# EAGLE board Lipo-Charger-5V-setup_RevC_onelayer (EAGLE 8.2.1)
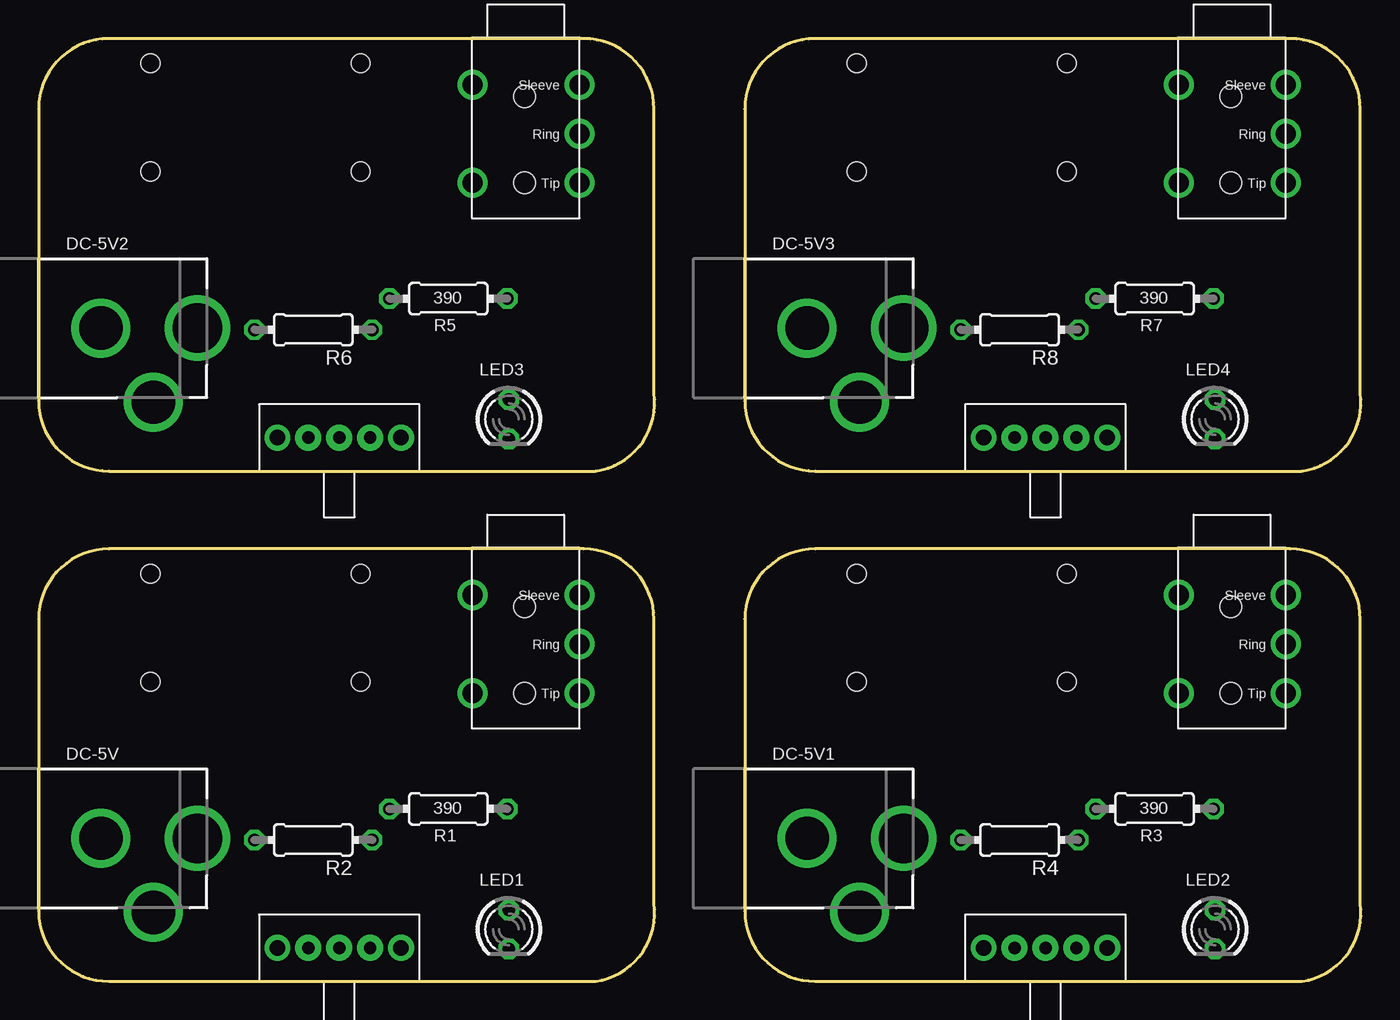
[diagram p0: board, top side]
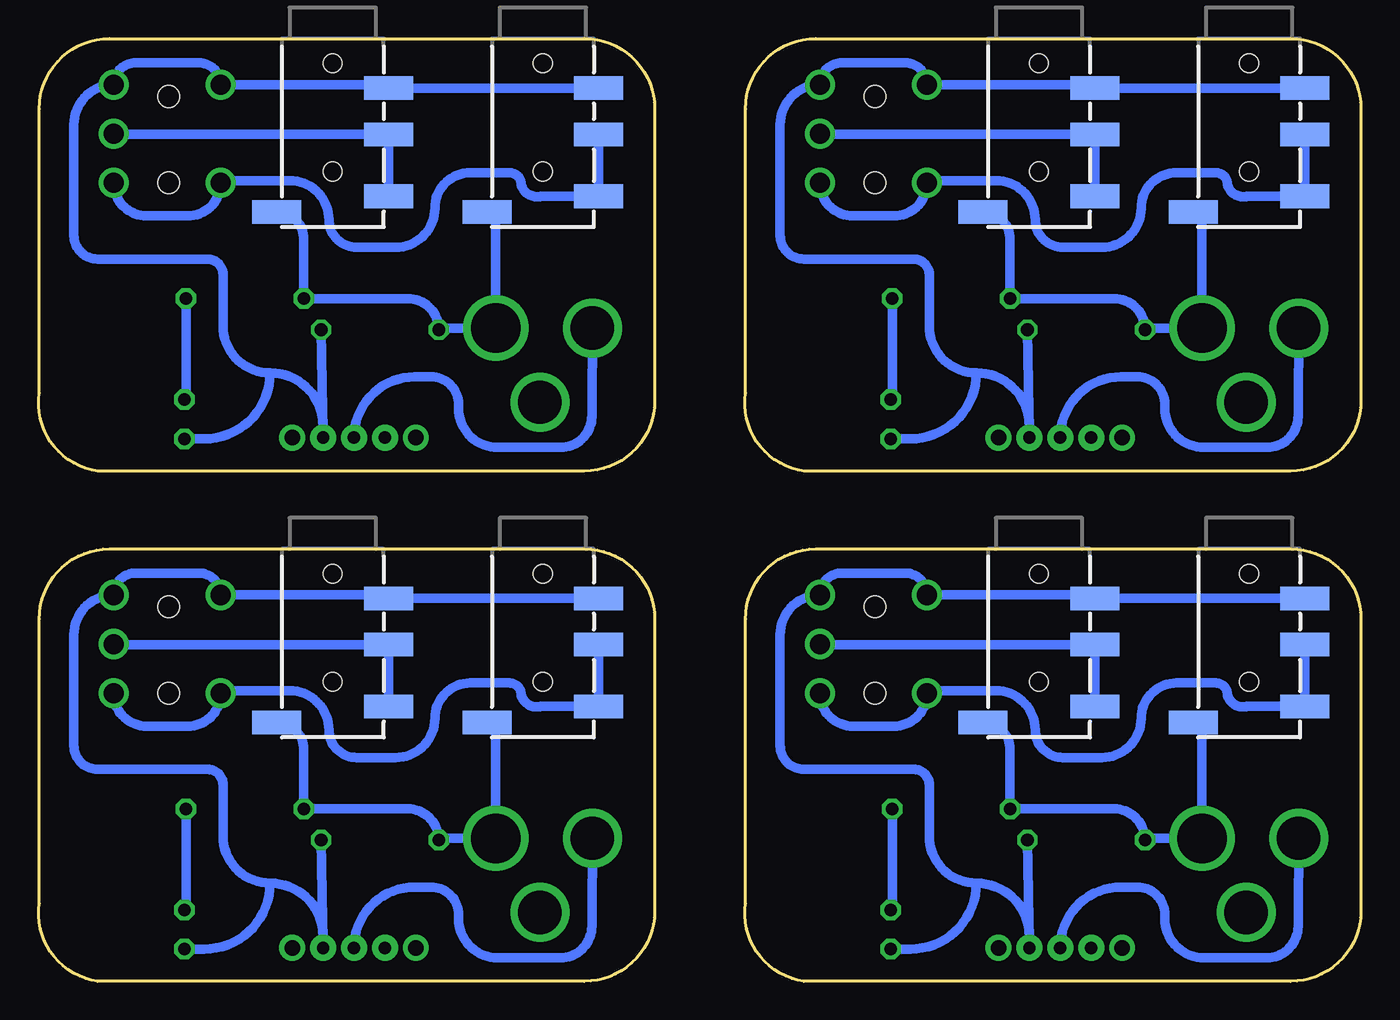
[diagram p1: board, bottom side, seen from below]

Size 85.6 x 61 mm. Coordinates in mm from the lower left corner, seen from the top.
Outline: 0,4.54 arc90 4.54,0 36.06,0 arc90 39.84,5.05 39.84,23.44 arc90 35.3,27.98 4.54,27.98 arc90 0,23.44 0,4.54
Outline: 45.72,4.54 arc90 50.26,0 81.78,0 arc90 85.56,5.05 85.56,23.44 arc90 81.02,27.98 50.26,27.98 arc90 45.72,23.44 45.72,4.54
Outline: 0,37.56 arc90 4.54,33.02 36.06,33.02 arc90 39.84,38.07 39.84,56.46 arc90 35.3,61 4.54,61 arc90 0,56.46 0,37.56
Outline: 45.72,37.56 arc90 50.26,33.02 81.78,33.02 arc90 85.56,38.07 85.56,56.46 arc90 81.02,61 50.26,61 arc90 45.72,56.46 45.72,37.56
Copper layers (1*16): Top 0.035mm / dielectric 1.5mm / Bottom 0.035mm
Design rules "default *": minimum track width 10mil, minimum drill 24mil, track to track 10mil, track to pad 10mil, pad to pad 10mil, via to via 10mil, smd to smd 8mil, copper to edge 40mil, drill to drill 8mil, minimum pad ring 10mil, minimum via ring 8mil, stop-mask expansion 4mil, vias tented up to drill 0mil, thermal gap 10mil

## Footprints (pad centres in the part's own frame; a part is rotated, then mirrored left to right if it is on the bottom)
1/8"-F-STEREO-PCB = drill 1.3: RING 5.461,0; SLEEVE1 8.636,6.934; SLEEVE2 8.636,0; TIP1 2.286,6.934; TIP2 2.286,0 | hole 1.4: 2.286,3.556; 7.874,3.556
DCJACK_2MM_PTH = drill 2.8: GND 0,7.35; GNDBREAK 4.8,10.75 | drill 3.2: PWR 0,13.6
LED3MM = drill 0.813 octagon: A -1.27,0; K 1.27,0
SWITCH_SPDT-TE-CONNECT = drill 0.8 pad 1.676: 1 2,0; 2 4,0; 3 6,0 | drill 1 pad 1.676: MOUNT1 0,0; MOUNT2 8,0
0204/7 = drill 0.813 octagon: 1 -3.81,0; 2 3.81,0
AUDIO-JACK-TRRS-SMD = smd 1.524 x 3.175: EARTH 11.227,-3.619; RING1 6.2,3.619; RING2 3.2,3.619; TIP 10.2,3.619 | hole 1.2: 1.6,0; 8.6,0

## Placement (x,y rotation side)
AUDIO_OUT  1/8"-F-STEREO-PCB  [1/8"-F-STEREO-PCB]  35.02,16.36 90 top
AUDIO_OUT1  1/8"-F-STEREO-PCB  [1/8"-F-STEREO-PCB]  80.74,16.36 90 top
AUDIO_OUT2  1/8"-F-STEREO-PCB  [1/8"-F-STEREO-PCB]  35.02,49.38 90 top
AUDIO_OUT3  1/8"-F-STEREO-PCB  [1/8"-F-STEREO-PCB]  80.74,49.38 90 top
DC-5V  [DCJACK_2MM_PTH]  -3.32,9.25 270 top
DC-5V1  [DCJACK_2MM_PTH]  42.4,9.25 270 top
DC-5V2  [DCJACK_2MM_PTH]  -3.32,42.27 270 top
DC-5V3  [DCJACK_2MM_PTH]  42.4,42.27 270 top
LED1  [LED3MM]  30.44,3.35 270 top
LED2  [LED3MM]  76.16,3.35 270 top
LED3  [LED3MM]  30.44,36.38 270 top
LED4  [LED3MM]  76.16,36.38 270 top
POWER  SPDT  [SWITCH_SPDT-TE-CONNECT]  15.46,2.16 0 top
POWER1  SPDT  [SWITCH_SPDT-TE-CONNECT]  61.18,2.16 0 top
POWER2  SPDT  [SWITCH_SPDT-TE-CONNECT]  15.46,35.18 0 top
POWER3  SPDT  [SWITCH_SPDT-TE-CONNECT]  61.18,35.18 0 top
R1  390  [0204/7]  26.52,11.16 180 top
R2  50  [0204/7]  17.78,9.14 180 top
R3  390  [0204/7]  72.24,11.16 180 top
R4  50  [0204/7]  63.5,9.14 180 top
R5  390  [0204/7]  26.52,44.18 180 top
R6  50  [0204/7]  17.78,42.16 180 top
R7  390  [0204/7]  72.24,44.18 180 top
R8  50  [0204/7]  63.5,42.16 180 top
U$1  AUDIO-JACK3LGPADS  [AUDIO-JACK-TRRS-SMD]  52.96,27.98 270 bottom
U$2  AUDIO-JACK3LGPADS  [AUDIO-JACK-TRRS-SMD]  66.56,27.98 270 bottom
U$3  AUDIO-JACK3LGPADS  [AUDIO-JACK-TRRS-SMD]  7.24,61 270 bottom
U$4  AUDIO-JACK3LGPADS  [AUDIO-JACK-TRRS-SMD]  7.24,27.98 270 bottom
U$5  AUDIO-JACK3LGPADS  [AUDIO-JACK-TRRS-SMD]  20.84,27.98 270 bottom
U$6  AUDIO-JACK3LGPADS  [AUDIO-JACK-TRRS-SMD]  20.84,61 270 bottom
U$7  AUDIO-JACK3LGPADS  [AUDIO-JACK-TRRS-SMD]  52.96,61 270 bottom
U$8  AUDIO-JACK3LGPADS  [AUDIO-JACK-TRRS-SMD]  66.56,61 270 bottom

## Library data of the parts
AUDIO_OUT AUDIO_OUT1-AUDIO_OUT3 POWER POWER1-POWER3 R1-R8 = CMU-ArtFab
DC-5V DC-5V1-DC-5V3 = microbuilder
LED1-LED4 = led
U$1-U$8 = CMU-ArtFab; 5V: +5V; AUDIO: AUDIO; AUDIO_: AUDIO; GND: GND

## Nets
+5V: DC-5V.PWR R1.2 R2.2 U$4.EARTH U$5.EARTH
+5V1: DC-5V1.PWR R3.2 R4.2 U$1.EARTH U$2.EARTH
+5V2: DC-5V2.PWR R5.2 R6.2 U$3.EARTH U$6.EARTH
+5V3: DC-5V3.PWR R7.2 R8.2 U$7.EARTH U$8.EARTH
GND: AUDIO_OUT.SLEEVE1 AUDIO_OUT.SLEEVE2 LED1.K POWER.3 R2.1 U$4.RING2 U$5.RING2
GND1: AUDIO_OUT1.SLEEVE1 AUDIO_OUT1.SLEEVE2 LED2.K POWER1.3 R4.1 U$1.RING2 U$2.RING2
GND2: AUDIO_OUT2.SLEEVE1 AUDIO_OUT2.SLEEVE2 LED3.K POWER2.3 R6.1 U$3.RING2 U$6.RING2
GND3: AUDIO_OUT3.SLEEVE1 AUDIO_OUT3.SLEEVE2 LED4.K POWER3.3 R8.1 U$7.RING2 U$8.RING2
GNDBREAK: DC-5V.GNDBREAK
GNDBREAK1: DC-5V1.GNDBREAK
GNDBREAK2: DC-5V2.GNDBREAK
GNDBREAK3: DC-5V3.GNDBREAK
N$1: LED2.A R3.1
N$2: LED1.A R1.1
N$3: AUDIO_OUT1.RING U$2.RING1 U$2.TIP
N$4: DC-5V.GND POWER.2
N$5: DC-5V1.GND POWER1.2
N$6: LED3.A R5.1
N$7: AUDIO_OUT2.RING U$6.RING1 U$6.TIP
N$8: AUDIO_OUT.RING U$5.RING1 U$5.TIP
N$9: DC-5V2.GND POWER2.2
N$10: LED4.A R7.1
N$11: AUDIO_OUT3.RING U$8.RING1 U$8.TIP
N$12: DC-5V3.GND POWER3.2
OUT1: AUDIO_OUT1.TIP1 AUDIO_OUT1.TIP2 U$1.RING1 U$1.TIP
OUT2: AUDIO_OUT.TIP1 AUDIO_OUT.TIP2 U$4.RING1 U$4.TIP
OUT3: AUDIO_OUT2.TIP1 AUDIO_OUT2.TIP2 U$3.RING1 U$3.TIP
OUT4: AUDIO_OUT3.TIP1 AUDIO_OUT3.TIP2 U$7.RING1 U$7.TIP

## Tracks (layer width: path | path; a pad name or v marks a point on that pad's centre or on a via)
+5V
  Bottom 0.61: U$5.EARTH arc90 22.71,15.01 R1.2 15.98,11.16 arc90 R2.2 arc90 13.86,9.25 DC-5V.PWR 10.28,16.18 arc-90 U$4.EARTH
+5V1
  Bottom 0.61: U$2.EARTH arc90 68.43,15.01 R3.2 61.7,11.16 arc90 R4.2 arc90 59.58,9.25 DC-5V1.PWR 56,16.18 arc-90 U$1.EARTH
+5V2
  Bottom 0.61: U$6.EARTH arc90 22.71,48.03 R5.2 15.98,44.18 arc90 R6.2 arc90 13.86,42.27 DC-5V2.PWR 10.28,49.2 arc-90 U$3.EARTH
+5V3
  Bottom 0.61: U$8.EARTH arc90 68.43,48.03 R7.2 61.7,44.18 arc90 R8.2 arc90 59.58,42.27 DC-5V3.PWR 56,49.2 arc-90 U$7.EARTH
GND
  Bottom 0.61: 24.89,6.35 arc90 27.94,9.4 27.94,12.7 arc-90 28.96,13.72 36.07,13.72 arc90 37.59,15.24 37.59,22.42 arc90 AUDIO_OUT.SLEEVE2 arc90 33.6,26.42 29.5,26.42 arc90 AUDIO_OUT.SLEEVE1 17.44,25 arc90 U$5.RING2 U$4.RING2 | 24.89,6.35 arc90 21.46,2.92 POWER.3 R2.1 | LED1.K 29.16,2.08 arc-90 24.89,6.35
GND1
  Bottom 0.61: 70.61,6.35 arc90 73.66,9.4 73.66,12.7 arc-90 74.68,13.72 81.79,13.72 arc90 83.31,15.24 83.31,22.42 arc90 AUDIO_OUT1.SLEEVE2 arc90 79.32,26.42 75.22,26.42 arc90 AUDIO_OUT1.SLEEVE1 63.16,25 arc90 U$2.RING2 U$1.RING2 | 70.61,6.35 arc90 67.18,2.92 POWER1.3 R4.1 | LED2.K 74.88,2.08 arc-90 70.61,6.35
GND2
  Bottom 0.61: 24.89,39.37 arc90 27.94,42.42 27.94,45.72 arc-90 28.96,46.74 36.07,46.74 arc90 37.59,48.26 37.59,55.44 arc90 AUDIO_OUT2.SLEEVE2 arc90 33.6,59.44 29.5,59.44 arc90 AUDIO_OUT2.SLEEVE1 17.44,58.02 arc90 U$6.RING2 U$3.RING2 | 24.89,39.37 arc90 21.46,35.94 POWER2.3 R6.1 | LED3.K 29.16,35.11 arc-90 24.89,39.37
GND3
  Bottom 0.61: 70.61,39.37 arc90 73.66,42.42 73.66,45.72 arc-90 74.68,46.74 81.79,46.74 arc90 83.31,48.26 83.31,55.44 arc90 AUDIO_OUT3.SLEEVE2 arc90 79.32,59.44 75.22,59.44 arc90 AUDIO_OUT3.SLEEVE1 63.16,58.02 arc90 U$8.RING2 U$7.RING2 | 70.61,39.37 arc90 67.18,35.94 POWER3.3 R8.1 | LED4.K 74.88,35.11 arc-90 70.61,39.37
N$1
  Bottom 0.61: R3.1 76.05,4.73 arc90 LED2.A
N$2
  Bottom 0.61: R1.1 30.33,4.73 arc90 LED1.A
N$3
  Bottom 0.61: U$2.TIP U$2.RING1 80.7,21.78 arc90 AUDIO_OUT1.RING
N$4
  Bottom 0.61: DC-5V.GND 4.06,4.06 4.06,3.56 arc90 6.1,1.52 10.16,1.52 arc90 12.7,4.06 12.7,4.32 arc-90 14.48,6.1 15.52,6.1 arc-90 POWER.2
N$5
  Bottom 0.61: DC-5V1.GND 49.78,4.06 49.78,3.56 arc90 51.82,1.52 55.88,1.52 arc90 58.42,4.06 58.42,4.32 arc-90 60.2,6.1 61.24,6.1 arc-90 POWER1.2
N$6
  Bottom 0.61: R5.1 30.33,37.75 arc90 LED3.A
N$7
  Bottom 0.61: U$6.TIP U$6.RING1 34.98,54.8 arc90 AUDIO_OUT2.RING
N$8
  Bottom 0.61: U$5.TIP U$5.RING1 34.98,21.78 arc90 AUDIO_OUT.RING
N$9
  Bottom 0.61: DC-5V2.GND 4.06,37.08 4.06,36.58 arc90 6.1,34.54 10.16,34.54 arc90 12.7,37.08 12.7,37.34 arc-90 14.48,39.12 15.52,39.12 arc-90 POWER2.2
N$10
  Bottom 0.61: R7.1 76.05,37.75 arc90 LED4.A
N$11
  Bottom 0.61: U$8.TIP U$8.RING1 80.7,54.8 arc90 AUDIO_OUT3.RING
N$12
  Bottom 0.61: DC-5V3.GND 49.78,37.08 49.78,36.58 arc90 51.82,34.54 55.88,34.54 arc90 58.42,37.08 58.42,37.34 arc-90 60.2,39.12 61.24,39.12 arc-90 POWER3.2
OUT1
  Bottom 0.61: U$1.RING1 U$1.TIP 53.09,17.78 arc90 54.36,18.54 arc-90 55.12,19.3 57.66,19.3 arc-90 59.94,17.02 arc90 62.48,14.48 65.02,14.48 arc90 66.8,16.26 arc-90 69.34,18.8 73.66,18.8 arc-90 AUDIO_OUT1.TIP1 arc90 75.94,16.51 78.6,16.51 arc90 AUDIO_OUT1.TIP2
OUT2
  Bottom 0.61: U$4.RING1 U$4.TIP 7.37,17.78 arc90 8.64,18.54 arc-90 9.4,19.3 11.94,19.3 arc-90 14.22,17.02 arc90 16.76,14.48 19.3,14.48 arc90 21.08,16.26 arc-90 23.62,18.8 27.94,18.8 arc-90 AUDIO_OUT.TIP1 arc90 30.22,16.51 32.88,16.51 arc90 AUDIO_OUT.TIP2
OUT3
  Bottom 0.61: U$3.RING1 U$3.TIP 7.37,50.8 arc90 8.64,51.56 arc-90 9.4,52.32 11.94,52.32 arc-90 14.22,50.04 arc90 16.76,47.5 19.3,47.5 arc90 21.08,49.28 arc-90 23.62,51.82 27.94,51.82 arc-90 AUDIO_OUT2.TIP1 arc90 30.22,49.53 32.88,49.53 arc90 AUDIO_OUT2.TIP2
OUT4
  Bottom 0.61: U$7.RING1 U$7.TIP 53.09,50.8 arc90 54.36,51.56 arc-90 55.12,52.32 57.66,52.32 arc-90 59.94,50.04 arc90 62.48,47.5 65.02,47.5 arc90 66.8,49.28 arc-90 69.34,51.82 73.66,51.82 arc-90 AUDIO_OUT3.TIP1 arc90 75.94,49.53 78.6,49.53 arc90 AUDIO_OUT3.TIP2